# Altium PCB QCopterNano_Pcb.PcbDoc
Units mil, origin at the board's own origin, x right, y up, seen from the top; angles counter-clockwise.
Board outline 3149.61 x 3149.61 mil, 2 copper layers (Top Layer, Bottom Layer); 30 components, 37 nets, 137 pads, 54 vias.
Unrouted connection lines stored in the file: 4.
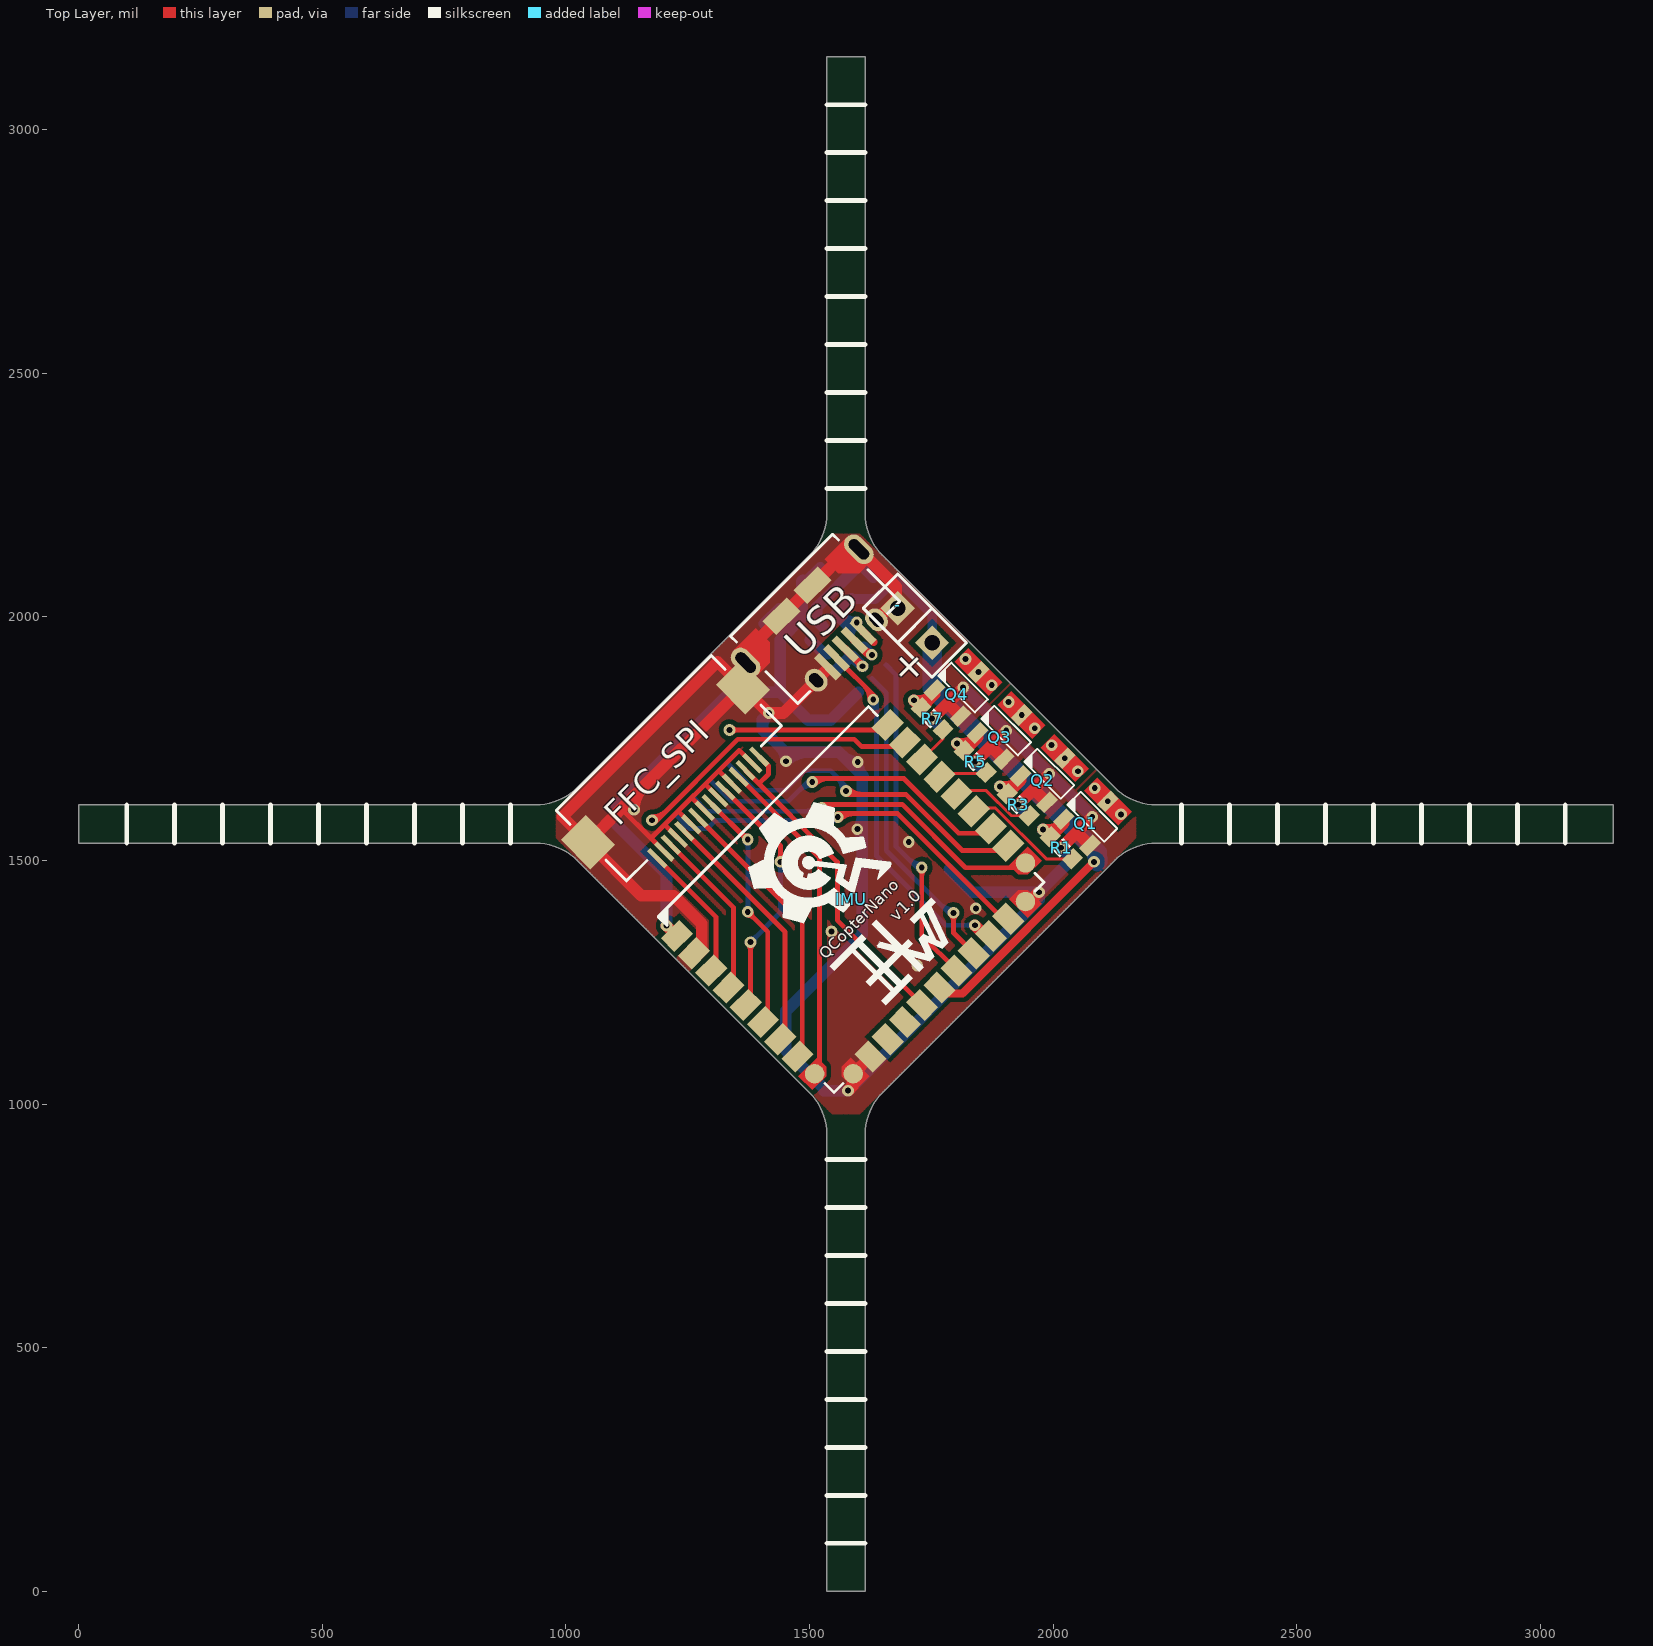
[diagram p0: Top Layer view]
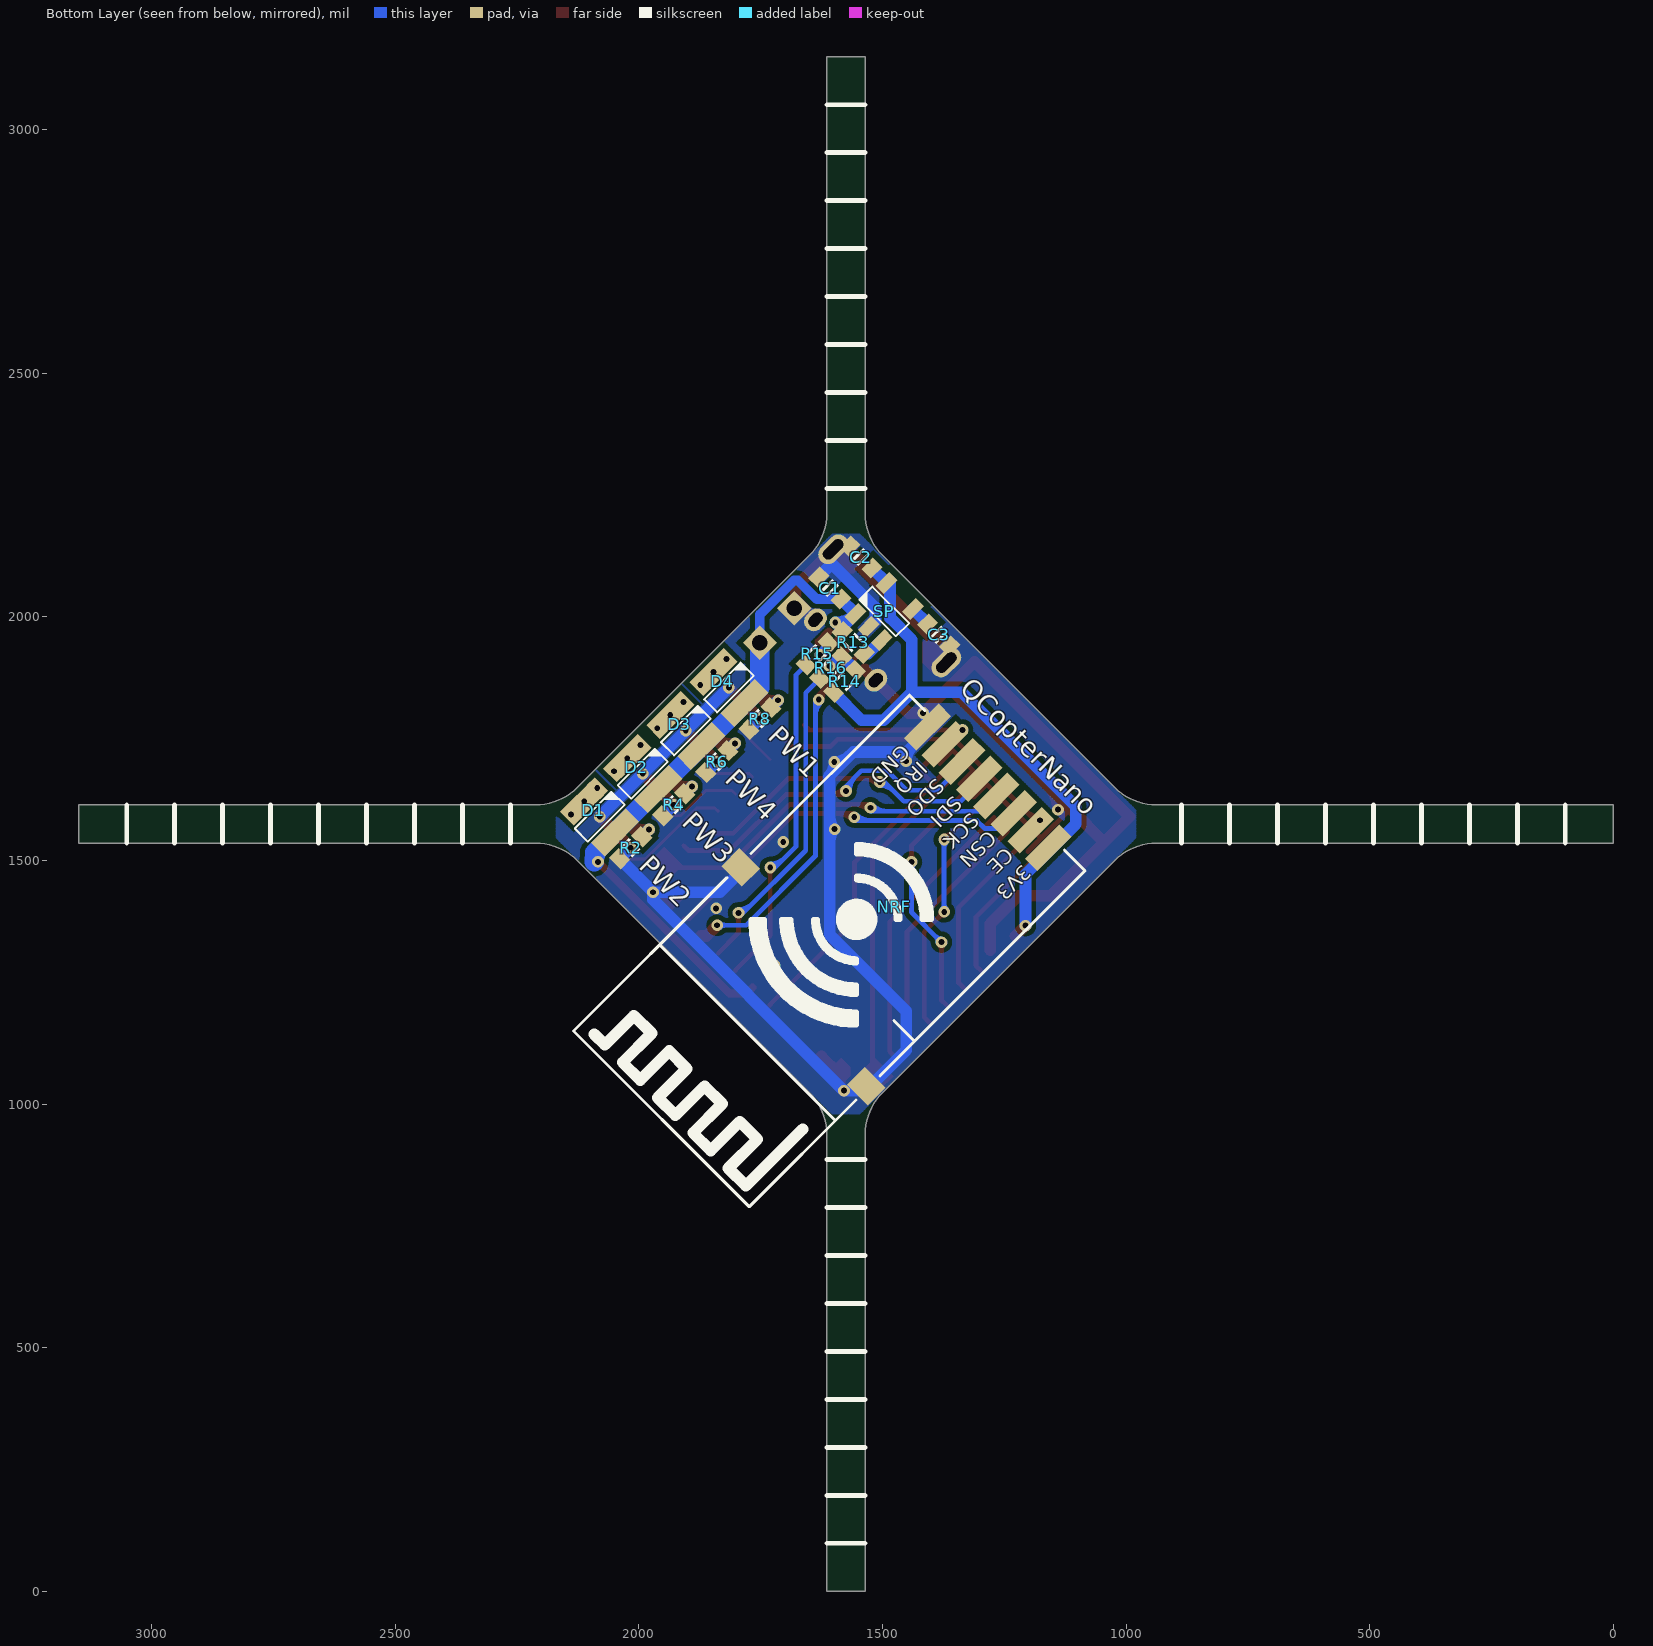
[diagram p1: Bottom Layer view, seen from below]
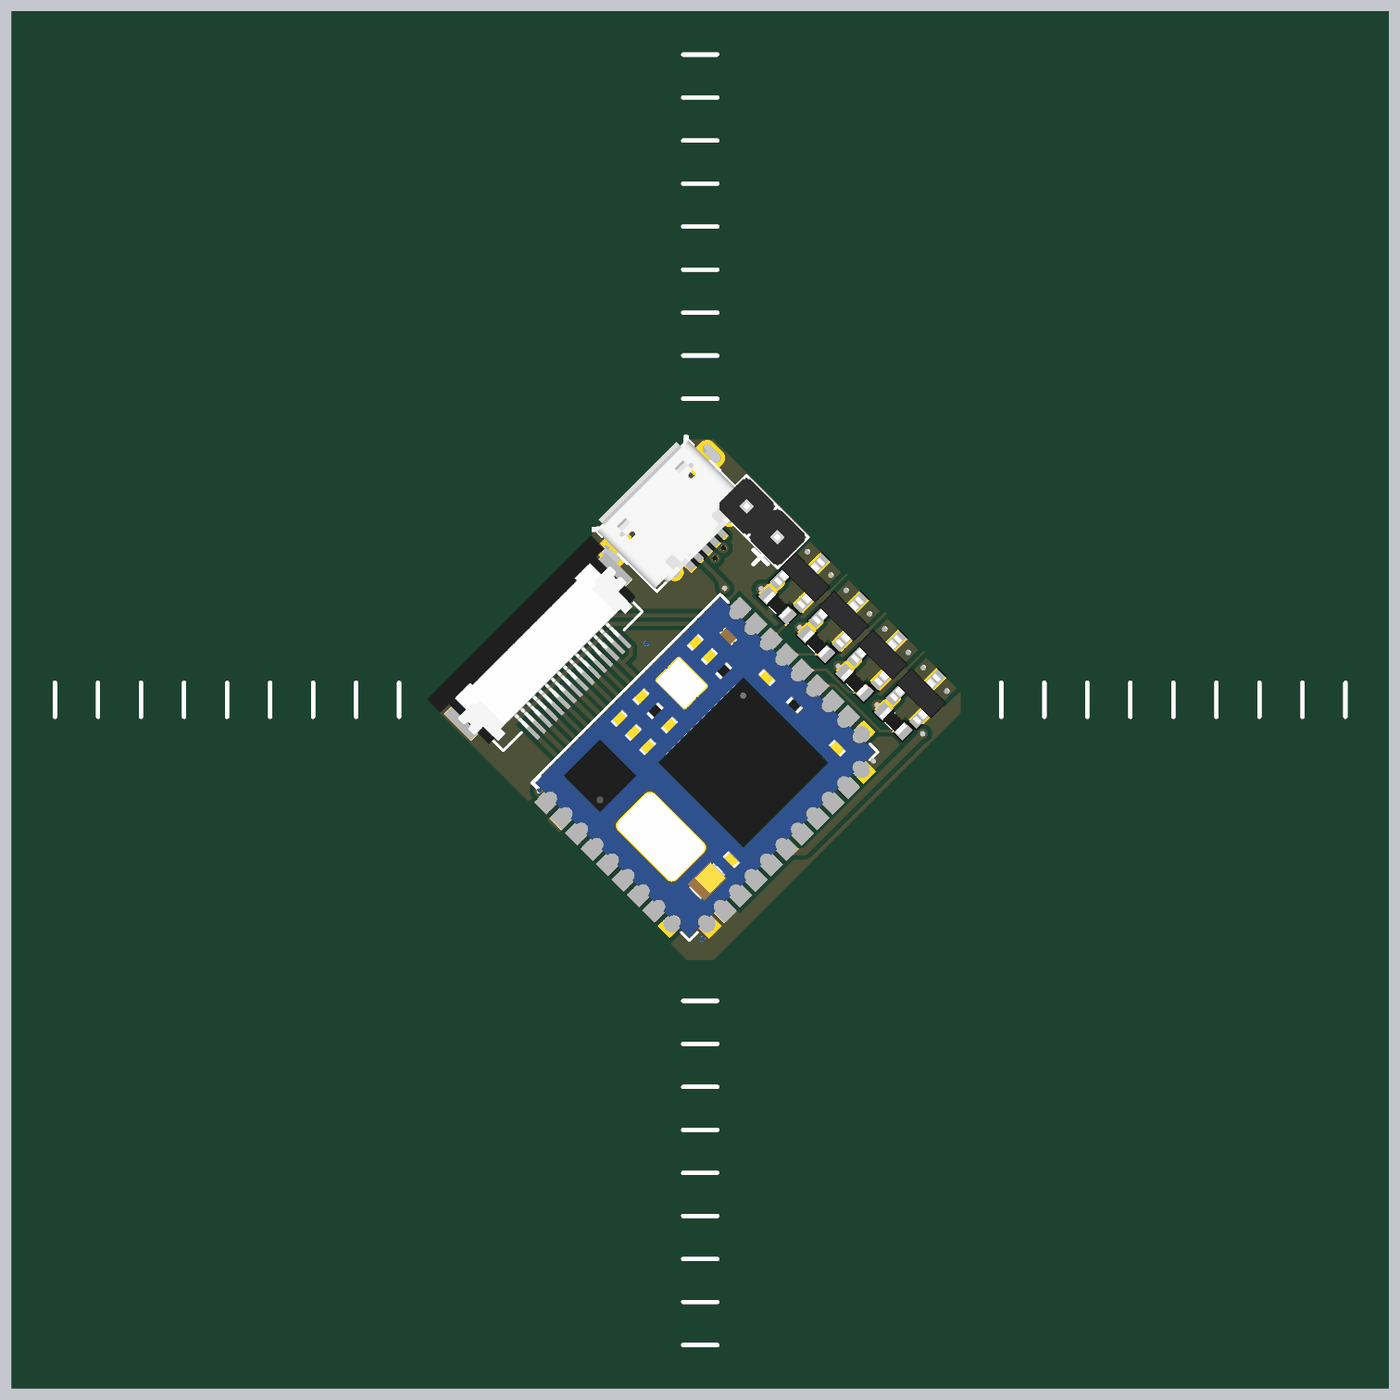
[diagram p2: 3D render of the assembled board from above, using the file's embedded part models]
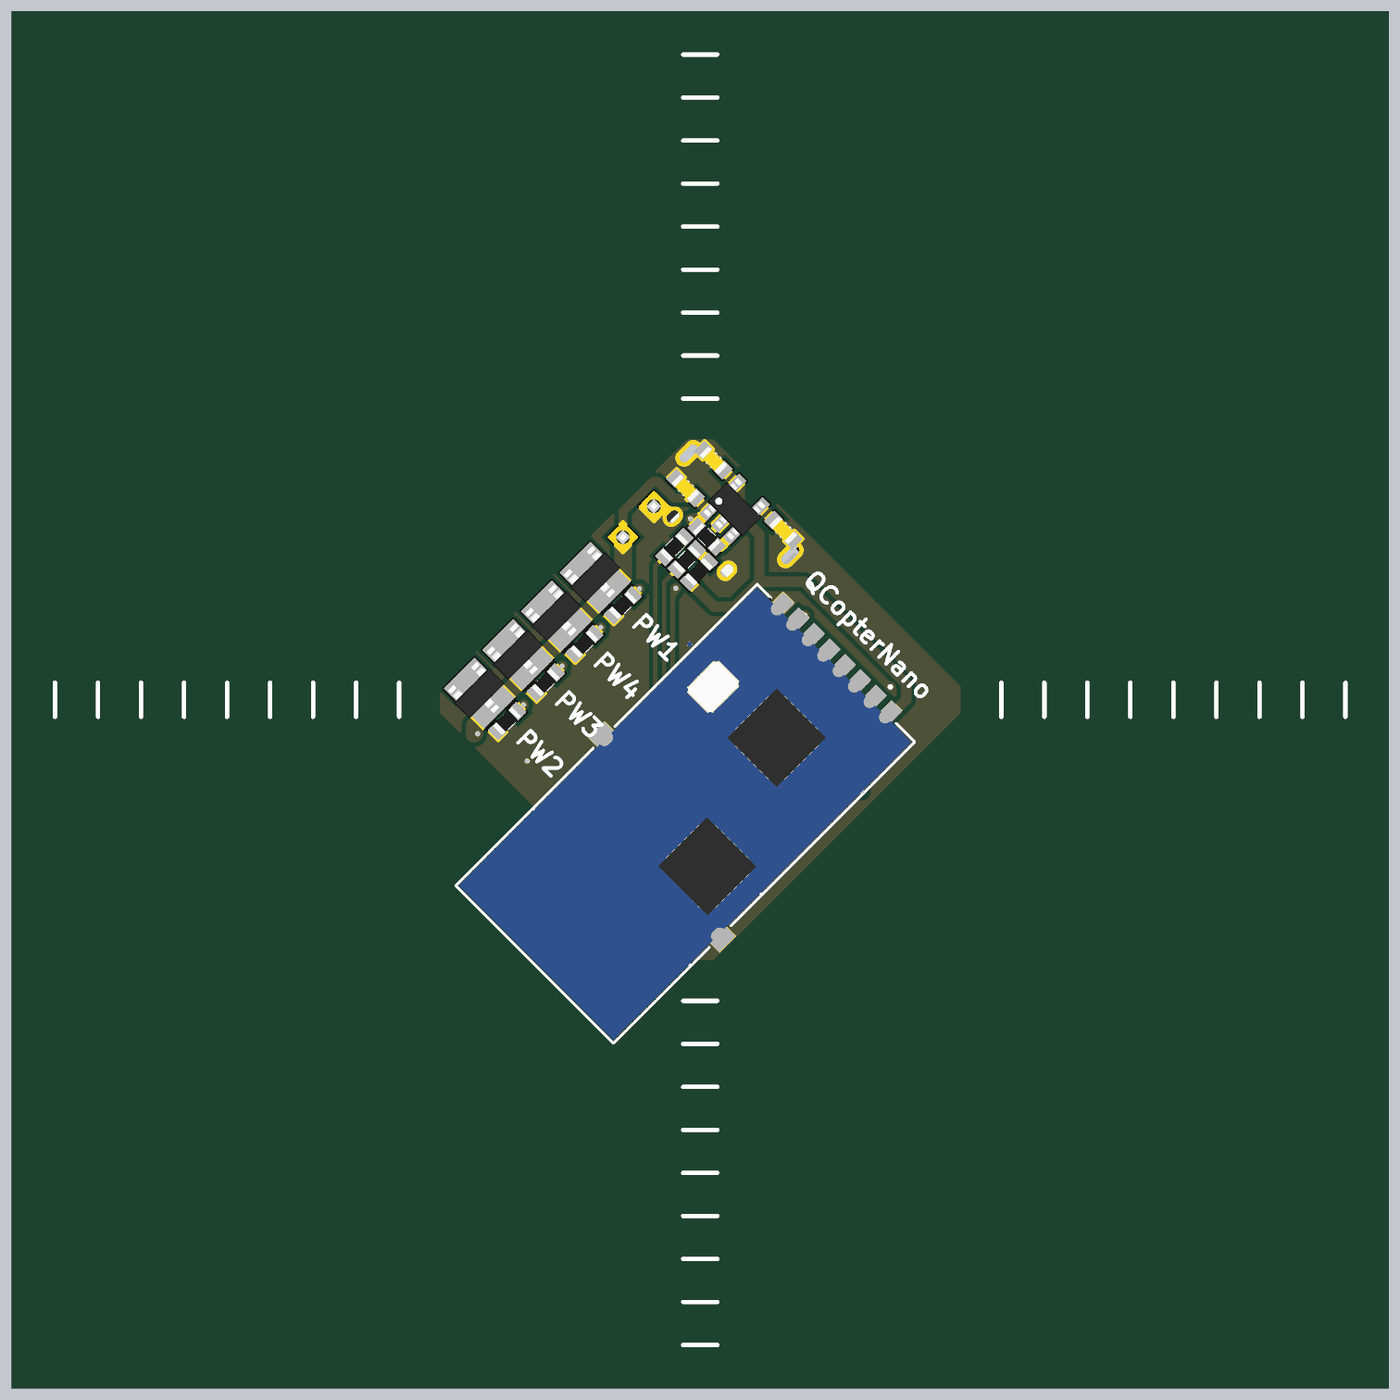
[diagram p3: 3D render of the assembled board from below, using the file's embedded part models]

## Layer stack, top to bottom
Top Solder: solder mask 0.4, Solder Resist, Dk 3.5
Top Layer: signal copper 1.4
Dielectric1: dielectric 12.6, FR-4, Dk 4.8
Bottom Layer: signal copper 1.4
Bottom Solder: solder mask 0.4, Solder Resist, Dk 3.5

## Board outline
938,1535.63 cw(c938,1414.92) 1023.35,1500.27 1500.27,1023.35 cw(c1414.92,938) 1535.63,938 1535.63,0.2 1614.37,0.2 1614.37,938 cw(c1735.08,938) 1649.73,1023.35 2126.65,1500.27 cw(c2212,1414.92) 2212,1535.63 3149.8,1535.63 3149.8,1614.37 2212,1614.37 cw(c2212,1735.08) 2126.65,1649.73 1649.73,2126.65 cw(c1735.08,2212) 1614.37,2212 1614.37,3149.8 1535.63,3149.8 1535.63,2212 cw(c1414.92,2212) 1500.27,2126.65 1023.35,1649.73 cw(c938,1735.08) 938,1614.37 0.2,1614.37 0.2,1535.63

## Design rules (kind name [scope] priority, off if disabled: settings)
Clearance ClearancePolygon [InPolygon] p1: gap=10
Clearance [All] p2: gap=6
ComponentClearance [All] p1: gap=0 collisioncheckmode=3 verticalgap=0 showdistances=FALSE
HoleToHoleClearance [All] p1: gap=6 allowstackedmicrovias=TRUE
MinimumSolderMaskSliver [All] p1: minsoldermaskwidth=1
PlaneConnect [All] p1: planeconnectstyle=Direct reliefexpansion=20 reliefentries=4 reliefconductorwidth=10 reliefairgap=10
PolygonConnect [All] p1: connectstyle=Direct reliefconductorwidth=10 reliefentries=4 polygonreliefangle="90 Angle" airgapwidth=10
RoutingVias [All] p1: holewidth=12 width=20 viastyle="Through Hole" minholewidth=12 minwidth=20 maxholewidth=28 maxwidth=50
SilkToSilkClearance [All] p1: silktosilkclearance=0
SilkToSolderMaskClearance [IsPad] p1: minsilkscreentomaskgap=1.5 clearancetoexposedcopper=TRUE
SolderMaskExpansion [All] p1: expansion=4
UnConnectedPin [All] p1 off:
Width [All] p1: maxlimit=50 minlimit=6 preferedwidth=10
23 further rules are at their usual default settings.

## Components (designator, comment, footprint, x,y, rotation, side; value= is the part's Value field where it differs from the comment)
+ "HDR1X1_180_2.54" HDR1X1_180_2.54 1751.78,1946.94 r45 top locked (schematic designator VIN)
- "HDR1X1_180_2.54" HDR1X1_180_2.54 1681.07,2017.65 r45 top locked (schematic designator GND)
C1 "Cap_0603" CAP_0603 1608.23,2059.37 r225 bottom locked
C2 "Cap_0603" CAP_0603 1544.59,2123.01 r225 bottom locked
C3 "Cap_0603" CAP_0603 1384.79,1963.2 r45 bottom locked
D1 "Diode_Schottky2" SOT23-3 2080.58,1589.85 r225 bottom locked
D2 "Diode_Schottky2" SOT23-3 1992.19,1678.24 r225 bottom locked
D3 "Diode_Schottky2" SOT23-3 1903.8,1766.63 r225 bottom locked
D4 "Diode_Schottky2" SOT23-3 1815.42,1855.01 r225 bottom locked
FFC_SPI "FFC_0.5_16" FFC_0.5_16 1246.9,1654.2 r225 top locked
IMU "SmartIMU_Full" SMART_IMU_FULL 1550.25,974.67 r45 top locked
NRF "nRF24L01P_PA_LNA" NRF24L01P_PA_LNA 1444.89,1839.46 r315 bottom locked
Q1 "MOS_N" SOT23-3 2080.58,1589.85 r45 top locked
Q2 "MOS_N" SOT23-3 1992.19,1678.24 r45 top locked
Q3 "MOS_N" SOT23-3 1903.8,1766.63 r45 top locked
Q4 "MOS_N" SOT23-3 1815.42,1855.01 r45 top locked
R1 "Res_0603" RES_0603 2016.94,1526.21 r135 top locked
R2 "Res_0603" RES_0603 2016.94,1526.21 r135 bottom locked
R3 "Res_0603" RES_0603 1928.55,1614.6 r135 top locked
R4 "Res_0603" RES_0603 1928.55,1614.6 r135 bottom locked
R5 "Res_0603" RES_0603 1840.16,1702.99 r135 top locked
R6 "Res_0603" RES_0603 1840.16,1702.99 r135 bottom locked
R7 "Res_0603" RES_0603 1751.78,1791.37 r135 top locked
R8 "Res_0603" RES_0603 1751.78,1791.37 r135 bottom locked
R13 "Res_0603" RES_0603 1560.15,1947.65 r225 bottom locked
R14 "Res_0603" RES_0603 1577.83,1867.74 r315 bottom locked
R15 "Res_0603" RES_0603 1634.4,1924.31 r315 bottom locked
R16 "Res_0603" RES_0603 1606.11,1896.03 r315 bottom locked
SP "SP6205" SOT23-5 1496.51,2011.28 r135 bottom locked
USB "USB_Micro" USB_Micro-AB 1485.2,2022.6 r45 top locked

## Footprints (in the part's own frame and the unit in brackets; to place one, negate y for a bottom-side part, rotate by r counter-clockwise, add the part's x,y. Pads: shape width x height; smd on the part's side, far side on the other; paste and mask are expansions set on the pad)
CAP_0603 [mil]
  rect 28x34 smd: 1(-32,0) 2(32,0)
  Top Layer pour cut-out: -18,17 18,17 18,-17 -18,-17
  silkscreen extent -10,-17 10,17, body extent -31,-16 31,16, height 36
FFC_0.5_16 [mil] "Connector; FH12 Series; 16 Position; 0.5mm Spaced Bottom Contact"
  rect 72x86 smd mask+1: 0(-225,-60) 0(225,-60)
  rect 10x50 smd mask+1: 1(-147.64,64) 2(-127.95,64) 3(-108.27,64) 4(-88.58,64) 5(-68.9,64) 6(-49.21,64) 7(-29.53,64) 8(-9.84,64) 9(9.84,64) 10(29.53,64) 11(49.21,64) 12(68.9,64) 13(88.58,64) 14(108.27,64) 15(127.95,64) 16(147.64,64)
  silkscreen extent -225,-152 225,52, body extent -266,-155 266,55, height 82
HDR1X1_180_2.54 [mm] "Connector; Header; 2 Position"
  rect 1.27x1.27 hole 0.8: 1(0,0)
  silkscreen extent -1.27,-1.27 1.27,1.27, body extent -1.27,-1.27 1.27,1.27, height 7.58
NRF24L01P_PA_LNA [mil]
  rect 100x36 smd mask+1: 1(20,422.6) 2(20,372.6) 3(20,322.6) 4(20,272.6) 5(20,222.6) 6(20,172.6) 7(20,122.6) 8(20,72.6)
  rect 52x60 smd mask+1: 8(495,5) 8(630,505)
  silkscreen extent 0,0 975,510, body extent 5,5 970,505, height 46
RES_0603 [mil]
  rect 28x34 smd: 1(-32,0) 2(32,0)
  Top Layer pour cut-out: -18,17 18,17 18,-17 -18,-17
  silkscreen extent -12,-17 12,17, body extent -31,-16 32,16, height 20
SMART_IMU_FULL [mil]
  rect 54x40 smd mask+1: 1(34,490) 2(34,440) 3(34,390) 4(34,340) 5(34,290) 6(34,240) 7(34,190) 8(34,140) 18(646,140) 19(646,190) 20(646,240) 21(646,290) 22(646,340) 23(646,390) 24(646,440) 25(646,490)
  rect 40x54 smd mask+1: 1(290,34) 2(140,34) 10(190,34) 11(240,34) 12(340,34) 13(390,34) 14(440,34) 15(490,34) 16(540,34)
  round 40 smd mask+0: 2(90,34) 2(590,34) 9(34,90) 17(646,90)
  Top Layer region: 673,110 619,110 619,84 633,70 673,70
  Top Layer region: 7,70 47,70 61,84 61,110 7,110
  Top Layer region: 110,7 110,61 84,61 70,47 70,7
  Top Layer region: 610,7 610,47 596,61 570,61 570,7
  silkscreen extent 35,35 645,545, body extent 40,40 640,540, height 84
SOT23-3 [mil] "SOT23, 3 pin"
  rect 40x24 smd: 1(-45,38) 2(-45,-38) 3(45,0)
  silkscreen extent -19,-53 19,53, body extent -55,-57 55,57, height 51
SOT23-5 [mil]
  rect 40x24 smd: 1(-45,38) 2(-45,0) 3(-45,-38) 4(45,-38) 5(45,38)
  silkscreen extent -19,-53 19,53, body extent -55,-57 55,57, height 57
USB_Micro-AB [mil]
  rect 15.75x64 smd: 1(51.18,-125) 2(25.59,-125) 3(0,-125) 4(-25.59,-125) 5(-51.18,-125)
  oval 40x70 hole 22 slot 50 at 90 deg mask+0: 5(-164.37,0) 5(164.37,0)
  oval 40x50 hole 22 slot 32 at 90 deg mask+0: 5(-87.6,-128) 5(87.6,-128)
  rect 70x40 smd mask+0: 5(-45,15) 5(45,15)
  Top Layer region: -164.37,35 -100,35 -100,-5 -130,-35 -164.37,-35
  Top Layer region: 100,35 164.37,35 164.37,-35 130,-35 100,-5
  silkscreen extent -148,-135 148,60, body extent -157,-138 157,75, height 107

## Part data
+ -: "Header"
C1 C2 C3: "Capacitor"
D1 D2 D3 D4: "Diode"
FFC_SPI: "FFC"
IMU NRF: "Module"
Q1 Q2 Q3 Q4: library part MOSFET_N, "MOSFET"
R1 R2 R3 R4 R5 R6 R7 R8 R13 R14 R15 R16: "Resistor"
SP: "Power"
USB: "USB"

## Free pads (board coordinates)
  rect 40x100 smd far side rot 45: 0(1783.6,1823.19) 0(1847.24,1886.83) 0(1871.98,1734.81) 0(1935.62,1798.45) 0(1960.37,1646.42) 0(2024.01,1710.06) 0(2048.76,1558.03) 0(2112.4,1621.67)

## Via types
v1: diameter 24, hole 12, Top Layer to Bottom Layer, 54 vias

## Nets (pads, with @x,y where several pads share a name; then routed paths per layer and width w, separated by ;. In a path a pad name is that pad's centre, name@x,y a point inside that pad or via, vN(x,y) a via of type N, cw(c..) or ccw(c..) an arc to the next point about the centre after c; other vN are vias at no path point)
3V3: C2.2 FFC_SPI.1 FFC_SPI.3 IMU.1 NRF.1 R14.2 SP.5 | length 1975.7
  Top Layer w10: FFC_SPI.3 1557.32,1496.89 1557.32,1377.72 IMU.1@1731.27,1203.77 ; 1396.29,1657.92 1415.9,1677.53 1415.9,1693.99 FFC_SPI.1
  Top Layer w24: v1(1206.6,1366.4) IMU.1@1227.81,1345.19
  Bottom Layer w24: v1(1206.6,1366.4) 1206.6,1471.62 1155.97,1522.25 1103.36,1574.86 1103.36,1611.06 1337.41,1845.11 1439.94,1845.11 ; SP.5@1486.61,2074.92 1484.57,2072.89 1484.57,2051.67 ; C2.2 SP.5 1491.56,2058.66 1484.57,2051.67 ; R14.2 1543.18,1787.84 1497.22,1787.84 1439.94,1845.11 ; 1439.94,1845.11 1439.94,1953.3 1484.57,1997.93 1484.57,2051.67
DM: IMU.14 R16.2 | length 711.5
  Top Layer w10: v1@1790.67,1387.62 cw(c1778.72,1375.67) 1795.62,1375.67 cw(c1812.52,1375.67) v1@1800.57,1387.62 ; v1(1795.62,1392.57) 1795.62,1351.55 IMU.14
  Bottom Layer w10: R16.2 1657.73,1844.41 1657.73,1520.55 v1@1790.67,1387.62 ; 1766.77,1411.52 ccw(c1795.62,1440.37) v1@1795.62,1399.57
DP: IMU.15 USB.4 | length 841.4
  Top Layer w10: USB.4@1555.49,1915.54 v1@1635.81,1835.22 ; 1611.91,1859.11 cw(c1583.06,1830.27) v1@1623.86,1830.27
  Top Layer w24: v1(1839.46,1367.11) 1861.38,1345.19 IMU.15
  Bottom Layer w10: v1@1625.91,1825.32 cw(c1596.89,1796.3) 1637.93,1796.3 ; v1@1632.98,1832.39 cw(c1621.03,1820.44) 1637.93,1820.44 ; v1@1637.93,1830.27 1637.93,1509.24 1780.06,1367.11 v1(1839.46,1367.11) ; v1@1834.51,1362.16 ccw(c1822.56,1350.21) 1822.56,1367.11 ccw(c1822.56,1384.01) v1@1834.51,1372.06
  other v1: 1630.86,1830.27
FFC_CS: FFC_SPI.6 IMU.5 | length 622.8
  Top Layer w10: FFC_SPI.6 1440.65,1530.05 v1(1440.65,1497.22) ; IMU.5 1379.13,1213.67 v1(1379.13,1332.46) ; v1@1374.18,1327.51 cw(c1362.23,1315.56) 1379.13,1315.56 cw(c1396.03,1315.56) v1@1384.08,1327.51 ; v1@1435.7,1502.17 ccw(c1423.75,1514.12) 1440.65,1514.12 ccw(c1457.55,1514.12) v1@1445.6,1502.17
  Bottom Layer w10: v1(1379.13,1332.46) 1440.65,1393.98 v1(1440.65,1497.22) ; v1@1379.13,1339.46 ccw(c1379.13,1356.36) 1391.08,1344.41 ccw(c1403.03,1332.46) v1@1386.13,1332.46 ; v1@1435.7,1492.27 cw(c1423.75,1480.32) 1440.65,1480.32 cw(c1457.55,1480.32) v1@1445.6,1492.27
FFC_IO: FFC_SPI.4 IMU.9 | length 682
  Top Layer w10: FFC_SPI.4 1520.55,1505.82 1520.55,1072.25 IMU.9
FFC_SCK: FFC_SPI.8 IMU.6 | length 609.3
  Top Layer w10: FFC_SPI.8 1371.84,1543.18 v1(1373.47,1543.18) ; 1358.73,1556.29 ccw(c1373.47,1571.03) v1@1373.47,1550.18 ; 1362.68,1552.34 cw(c1353.52,1543.18) v1@1366.47,1543.18 ; v1@1373.47,1387.69 cw(c1373.47,1370.79) 1385.42,1382.74 cw(c1397.37,1394.69) v1@1380.47,1394.69 ; v1@1373.47,1391.86 v1(1373.47,1394.69) 1414.49,1353.68 1414.49,1178.31 IMU.6
  Bottom Layer w10: v1@1368.52,1399.64 ccw(c1356.58,1411.59) 1373.47,1411.59 ccw(c1390.37,1411.59) v1@1378.42,1399.64 ; v1@1368.52,1538.23 cw(c1356.58,1526.28) 1373.47,1526.28 cw(c1390.37,1526.28) v1@1378.42,1538.23 ; v1(1373.47,1394.69) v1(1373.47,1543.18)
FFC_SDI: FFC_SPI.10 IMU.8 | length 583.1
  Top Layer w10: FFC_SPI.10 1485.2,1374.14 1485.2,1107.6 IMU.8
FFC_SDO: FFC_SPI.12 IMU.7 | length 516.8
  Top Layer w10: FFC_SPI.12 1449.84,1353.82 1449.84,1142.96 IMU.7
GND: -.1 C1.1 C2.1 C3.1 FFC_SPI.0 FFC_SPI.2 FFC_SPI.5 FFC_SPI.7 FFC_SPI.9 FFC_SPI.11 FFC_SPI.13 FFC_SPI.15 IMU.2 NRF.8 Q1.2 Q2.2 Q3.2 Q4.2 R2.1 R4.1 R6.1 R8.1 SP.2 USB.5 | length 6434.4
  Top Layer w10: 1114,1606.15 1174.78,1545.37 ; FFC_SPI.15 1174.78,1545.37 ; 1202.62,1573.21 FFC_SPI.13 ; 1230.46,1601.05 FFC_SPI.11 ; 1258.29,1628.89 FFC_SPI.9 ; 1286.13,1656.72 FFC_SPI.7 ; 1313.97,1684.56 FFC_SPI.5 ; FFC_SPI.2 1355.73,1726.32 1174.78,1545.37
  Top Layer w24: v1(1139.99,1604.56) cw(c1206.56,1604.56) 1159.49,1651.63 ; IMU.2@1279.04,1315.81 1279.04,1370.32 1221.45,1427.92 1154.98,1427.92 FFC_SPI.0@1045.38,1537.52 ; USB.5@1368.97,1906.37 1368.97,1927.58 1442.77,2001.39 1506.41,2065.02 1580.21,2138.83 1601.42,2138.83 1678.24,2062.01 1678.24,2034.62 USB.5@1637.65,1994.03 ; USB.5@1536.11,1892.49 1513.77,1870.15 1446.31,1802.69 v1(1416.61,1802.69) FFC_SPI.0@1363.57,1855.72 ; IMU.2@1589.85,1053.31 cw(c1553.64,1053.31) v1(1579.24,1027.7) 1589.85,1038.31 1589.85,1062.35 IMU.2@1625.2,1097.7 ; v1(1751.78,1791.37) 1783.6,1823.19 ; Q4.2 1783.6,1823.19 ; v1(1815.42,1855.01) 1783.6,1823.19 ; v1(1840.16,1702.99) 1871.98,1734.81 ; Q3.2 1871.98,1734.81 ; v1(1903.8,1766.63) 1871.98,1734.81 ; v1(1928.55,1614.6) 1960.37,1646.42 ; IMU.2@1951.89,1415.9 v1(1970.98,1434.99) ; Q2.2 1960.37,1646.42 ; v1(1992.19,1678.24) 1960.37,1646.42 ; v1(2016.94,1526.21) 2048.76,1558.03 ; Q1.2 2048.76,1558.03 ; v1(2080.58,1589.85) 2048.76,1558.03 ; FFC_SPI.0@1045.38,1537.52 993.05,1589.85 1311.25,1908.05 FFC_SPI.0@1363.57,1855.72 ; FFC_SPI.0@1045.38,1537.52 1114,1606.15 FFC_SPI.0@1363.57,1855.72
  Bottom Layer w24: NRF.8@1403.46,1770.94 cw(c1448.36,1770.94) v1(1416.61,1802.69) 1403.46,1789.54 1403.46,1769.74 1450.41,1722.79 ; 1439.56,1733.63 cw(c1409.62,1703.69) v1(1451.96,1703.69) ; 1498.06,1722.79 ccw(c1498.06,1657.6) v1(1451.96,1703.69) ; SP.2 1514.57,1993.22 1514.57,2019.45 1603.99,2108.87 C1.1 ; NRF.8@1529.04,1027.7 v1(1579.24,1027.7) 1970.98,1419.44 v1(1970.98,1434.99) ; NRF.8@1529.04,1032.65 1451.26,1110.43 1451.26,1191.04 1608.23,1348.02 1608.23,1674.7 1560.15,1722.79 1450.41,1722.79 ; 1567.66,1715.28 ccw(c1599.04,1746.66) v1(1599.04,1702.28) ccw(c1637.98,1700.11) 1610.4,1672.53 ; 1608.23,1540.49 ccw(c1574.43,1540.49) v1(1598.33,1564.39) ccw(c1574.43,1588.29) 1608.23,1588.29 ; v1(1751.78,1791.37) R8.1 ; NRF.8@1787.13,1481.66 1833.8,1434.99 v1(1970.98,1434.99) ; v1(1815.42,1855.01) v1(1903.8,1766.63) v1(1992.19,1678.24) v1(2080.58,1589.85) ; v1(1840.16,1702.99) R6.1 ; v1(1928.55,1614.6) R4.1 ; 1959.98,1408.44 ccw(c1933.42,1434.99) v1(1970.98,1434.99) ; v1(2016.94,1526.21) R2.1 v1(1970.98,1434.99) ; 1450.41,1722.78 cw(c1439.95,1712.33) v1(1451.96,1703.69)
  other v1: 1721.37,1284.38 1545.3,1354.38 1841.58,1401.76 1703.69,1538.23
ID: IMU.13 R15.2 | length 748.5
  Top Layer w10: v1@1725.61,1480.95 cw(c1713.66,1469) 1730.56,1469 cw(c1747.46,1469) v1@1735.51,1480.95 ; v1(1730.56,1485.9) 1730.56,1345.9 IMU.13
  Bottom Layer w10: R15.2 1677.53,1881.18 1677.53,1529.04 v1@1725.44,1481.13 ; 1701.71,1504.85 ccw(c1730.56,1533.7) v1@1730.56,1492.9
M1: D1.1 D1.2 pad.0@2112.4,1621.67 Q1.3
  other v1: 2139.27,1594.8 2112.4,1621.67 2085.53,1648.54
M2: D2.1 D2.2 pad.0@2024.01,1710.06 Q2.3
  other v1: 2050.88,1683.19 2024.01,1710.06 1997.14,1736.93
M3: D3.1 D3.2 pad.0@1935.62,1798.45 Q3.3
  other v1: 1962.49,1771.58 1935.62,1798.45 1908.75,1825.32
M4: D4.1 D4.2 pad.0@1847.24,1886.83 Q4.3
  other v1: 1874.11,1859.96 1847.24,1886.83 1820.37,1913.7
NetC3_2: C3.2 SP.4 | length 43
  Bottom Layer w24: C3.2 SP.4
NetQ1_1: Q1.1 R1.2 R2.2 | length 135.6
  Top Layer w24: Q1.1 Q1.1@2021.89,1576.41 ; Q1.1@2021.89,1576.41 cw(c1988.86,1609.44) v1(1979.47,1563.69) R1.2 Q1.1@2021.89,1576.41
  Bottom Layer w24: v1(1979.47,1563.69) R2.2
NetQ2_1: Q2.1 R3.2 R4.2 | length 135.6
  Top Layer w24: Q2.1 Q2.1@1933.5,1664.8 ; Q2.1@1933.5,1664.8 cw(c1900.47,1697.83) v1(1891.08,1652.07) R3.2 Q2.1@1933.5,1664.8
  Bottom Layer w24: v1(1891.08,1652.07) R4.2
NetQ3_1: Q3.1 R5.2 R6.2 | length 135.6
  Top Layer w24: Q3.1 Q3.1@1845.11,1753.19 ; Q3.1@1845.11,1753.19 cw(c1812.08,1786.22) v1(1802.69,1740.46) R5.2 Q3.1@1845.11,1753.19
  Bottom Layer w24: v1(1802.69,1740.46) R6.2
NetQ4_1: Q4.1 R7.2 R8.2 | length 135.6
  Top Layer w24: Q4.1 Q4.1@1756.73,1841.58 ; Q4.1@1756.73,1841.58 cw(c1723.7,1874.61) v1(1714.3,1828.85) R7.2 Q4.1@1756.73,1841.58
  Bottom Layer w24: v1(1714.3,1828.85) R8.2
NetR13_2: R13.2 SP.3 | length 47.5
  Bottom Layer w24: SP.3 1529.04,1925.02 R13.2
NetR14_1: R14.1 R16.1 USB.3 | length 119.7
  Top Layer w16: USB.3 v1@1606.11,1901.68
  Bottom Layer w24: R14.1 R16.1 1589.14,1918.65 v1(1608.94,1898.85)
NetR15_1: R15.1 USB.2 | length 89.8
  Top Layer w16: USB.2 1619.13,1924.85 1619.71,1924.85 1622.38,1922.19 v1@1626.62,1922.19 ; USB.2@1610.56,1933.43 ccw(c1628.03,1950.9) v1@1628.03,1926.19
  Bottom Layer w22: R15.1@1611.77,1938.45 v1(1628.03,1922.19)
NRF_CE: IMU.24 NRF.2 | length 627
  Top Layer w10: v1@1176.9,1589.78 ccw(c1176.9,1630.58) 1205.75,1601.73 ; v1@1181.85,1577.83 1352.97,1748.95 1591.97,1748.95 1607.21,1733.71 1687.04,1733.71 IMU.24
  other v1: 1176.9,1582.78
NRF_CSN: IMU.16 NRF.3 | length 879.7
  Top Layer w10: v1@1555.91,1591.26 cw(c1567.86,1579.31) 1567.86,1596.21 ; v1@1558.03,1596.21 1681.07,1596.21 1896.73,1380.55 IMU.16 ; v1@1562.98,1584.19 cw(c1592,1555.17) 1592,1596.21
  Bottom Layer w10: NRF.3@1226.68,1592.96 1253.83,1565.81 1290.04,1565.81 1306.3,1582.07 v1@1558.03,1582.07 ; 1524.06,1582.07 ccw(c1524.06,1623.11) v1@1553.08,1594.09 ; 1548.2,1582.07 ccw(c1548.2,1598.97) v1@1560.15,1587.02
  other v1: 1558.03,1589.14
NRF_IRQ: IMU.25 NRF.7 | length 355.2
  Top Layer w10: v1(1336,1768.04) 1650.66,1768.04 IMU.25 ; v1@1340.95,1763.09 cw(c1352.9,1751.14) 1352.9,1768.04 cw(c1352.9,1784.94) v1@1340.95,1772.99
NRF_SCK: IMU.17 NRF.4 | length 841.2
  Top Layer w10: v1@1522.67,1610.36 cw(c1534.62,1598.41) 1534.62,1615.31 ; v1@1524.8,1615.31 1690.26,1615.31 1820.37,1485.2 IMU.17@1932.09,1485.2 ; v1@1529.75,1603.28 cw(c1558.77,1574.26) 1558.77,1615.31 ; IMU.17@1932.8,1484.49 IMU.17
  Bottom Layer w10: NRF.4@1262.04,1628.32 1289.19,1601.16 v1@1524.8,1601.16 ; 1490.82,1601.16 ccw(c1490.82,1642.2) v1@1519.85,1613.18 ; 1514.97,1601.16 ccw(c1514.97,1618.06) v1@1526.92,1606.11
  other v1: 1524.8,1608.23
NRF_SDI: IMU.19 NRF.5 | length 734.4
  Top Layer w10: v1@1503.58,1663.39 cw(c1515.53,1651.44) 1515.53,1668.34 ; v1@1505.7,1668.34 1693.79,1668.34 1806.22,1555.91 1862.79,1555.91 IMU.19 ; v1@1510.65,1656.32 cw(c1539.67,1627.3) 1539.67,1668.34
  Bottom Layer w10: NRF.5@1297.39,1663.67 1339.39,1621.67 1456.21,1621.67 v1@1500.75,1666.22 ; 1476.85,1642.32 cw(c1505.7,1613.47) v1@1505.7,1654.27
  other v1: 1505.7,1661.27
NRF_SDO: IMU.18 NRF.6 | length 763.8
  Top Layer w10: v1@1572.88,1640.76 ccw(c1584.83,1652.71) 1584.83,1635.81 ; v1@1575,1635.81 1698.04,1635.81 1813.29,1520.55 1898.15,1520.55 IMU.18 ; v1@1579.95,1647.83 ccw(c1608.97,1676.85) 1608.97,1635.81
  Bottom Layer w10: NRF.6@1332.75,1699.03 1387.48,1644.3 1450.55,1644.3 1490.52,1684.27 1543.41,1684.27 v1@1579.95,1647.73 ; 1556.12,1671.56 cw(c1527.44,1642.88) v1@1568,1642.88
  other v1: 1575,1642.88
PWM1: IMU.20 R1.1 | length 248.4
  Top Layer w6: IMU.20 1844.22,1608.04 1881.37,1608.04 1985.83,1503.58 R1.1
PWM2: IMU.21 R3.1 | length 173.4
  Top Layer w6: IMU.21 1808.86,1643.4 1862.98,1643.4 1914.41,1591.97 R3.1
PWM3: IMU.22 R5.1 | length 97.4
  Top Layer w6: IMU.22 1773.5,1678.75 R5.1@1861.19,1678.75
PWM4: IMU.23 R7.1 | length 79.4
  Top Layer w6: IMU.23 1774.4,1750.36 R7.1
RX: FFC_SPI.14 IMU.4 | length 350.5
  Top Layer w10: FFC_SPI.14 1343.78,1404.21 1343.78,1249.02 IMU.4
SWC: IMU.10
SWD: IMU.11
TX: FFC_SPI.16 IMU.3 | length 284.1
  Top Layer w10: FFC_SPI.16 1308.42,1383.89 1308.42,1284.38 IMU.3
VBUS: +.1 C1.2 D1.3 D2.3 D3.3 D4.3 IMU.12 pad.0@1783.6,1823.19 pad.0@1871.98,1734.81 pad.0@1960.37,1646.42 pad.0@2048.76,1558.03 R13.1 SP.1 USB.1 | length 1596.7
  Top Layer w16: USB.1 USB.1@1631.82,1948.35 ; IMU.12 1778.5,1227.25 1814.14,1227.25 v1(2084.12,1497.22)
  Bottom Layer w20: C1.2 1635.1,2036.74 1673.29,2074.92 1681.77,2074.92 1751.78,2004.92 +.1 +.1@1744,1939.16
  Bottom Layer w24: SP.1@1555.88,2005.66 ccw(c1596.92,2046.7) v1(1596.92,1988.66) ; R13.1@1582.78,1978.76 SP.1 C1.2 ; 2084.12,1522.67 v1(2084.12,1497.22) ; v1(1596.92,1988.66) ccw(c1601.8,1970.27) R13.1 1582.78,1974.52 v1(1596.92,1988.66) ; v1(2084.12,1497.22) ccw(c2075.28,1518.43) 2098.26,1518.43 2098.26,1511.36 v1(2084.12,1497.22)
  Bottom Layer w40: +.1 1751.78,1855.01 D1.3 ; pad.0@2055.83,1550.96 2091.19,1515.6 ; pad.0@2079.77,1527.02 cw(c2049.97,1497.22) v1@2092.12,1497.22

## Polygon pours and split planes (outlines as drawn)
GND on Bottom Layer "Top Layer" (hatched 90Degree grid 2 track 4, remove dead copper, pour order 5): 981.03,1546.72 981.03,1603.28 1546.72,2168.97 1603.28,2168.97 2168.97,1603.28 2168.97,1546.72 1603.28,981.03 1546.72,981.03
GND on Top Layer "Top Layer" (hatched 90Degree grid 2 track 4, remove dead copper, pour order 3): 981.03,1546.72 981.03,1603.28 1546.72,2168.97 1603.28,2168.97 2168.97,1603.28 2168.97,1546.72 1603.28,981.03 1546.72,981.03

## Other copper
Top Layer:
  region net M1: 2133.61,1572.17 2161.9,1600.46 2091.19,1671.17 2062.9,1642.88
  region net M2: 2045.23,1660.56 2073.51,1688.84 2002.8,1759.55 1974.52,1731.27
  region net M3: 1956.84,1748.95 1985.12,1777.23 1914.41,1847.94 1886.13,1819.66
  region net M4: 1868.45,1837.34 1896.73,1865.62 1826.02,1936.33 1797.74,1908.05

## Silkscreen, mask and mechanical layers (free items; w line width, h text height)
Top Overlay:
  drawing of 3120 lines, arcs and shapes, not listed
  text "v1.0" at 1678.77,1373.3 h25 r45
  text "QCopterNano" at 1533.1,1295.52 h23 r45
Bottom Overlay:
  lines w10: 98.62,1536.1 98.62,1613.9 ; 197.05,1536.1 197.05,1613.9 ; 295.47,1536.1 295.47,1613.9 ; 393.9,1536.1 393.9,1613.9 ; 492.32,1536.1 492.32,1613.9 ; 590.75,1536.1 590.75,1613.9 ; 689.17,1536.1 689.17,1613.9 ; 787.6,1536.1 787.6,1613.9 ; 886.02,1536.1 886.02,1613.9 ; 1536.1,98.62 1613.9,98.62 ; 1536.1,197.05 1613.9,197.05 ; 1536.1,295.47 1613.9,295.47 ; 1536.1,393.9 1613.9,393.9 ; 1536.1,492.32 1613.9,492.32 ; 1536.1,590.75 1613.9,590.75 ; 1536.1,689.17 1613.9,689.17 ; 1536.1,787.6 1613.9,787.6 ; 1536.1,886.02 1613.9,886.02 ; 1536.1,2263.98 1613.9,2263.98 ; 1536.1,2362.4 1613.9,2362.4 ; 1536.1,2460.83 1613.9,2460.83 ; 1536.1,2559.25 1613.9,2559.25 ; 1536.1,2657.68 1613.9,2657.68 ; 1536.1,2756.1 1613.9,2756.1 ; 1536.1,2854.53 1613.9,2854.53 ; 1536.1,2952.95 1613.9,2952.95 ; 1536.1,3051.38 1613.9,3051.38 ; 2263.98,1536.1 2263.98,1613.9 ; 2362.4,1536.1 2362.4,1613.9 ; 2460.83,1536.1 2460.83,1613.9 ; 2559.25,1536.1 2559.25,1613.9 ; 2657.68,1536.1 2657.68,1613.9 ; 2756.1,1536.1 2756.1,1613.9 ; 2854.53,1536.1 2854.53,1613.9 ; 2952.95,1536.1 2952.95,1613.9 ; 3051.38,1536.1 3051.38,1613.9
  text "QCopterNano" at 1343.78,1850.06 h40 r45
  text "PW1" at 1737.63,1751.78 h40 r45
  text "PW4" at 1826.02,1663.39 h40 r45
  text "PW3" at 1914.41,1575 h40 r45
  text "PW2" at 2002.8,1486.61 h40 r45
Mechanical 1:
  the board outline again, w2
Mechanical 13:
  circle w2: c0.2,1575 r885.83
  circle w2: c3149.8,1575 r885.83
  circle w2: c1575,0.2 r885.83
  circle w2: c1575,3149.8 r885.83
  lines w2: -13.24,1561.57 13.63,1588.43 ; -13.24,1588.43 13.63,1561.57 ; 1561.56,-13.24 1588.43,13.63 ; 1561.56,13.63 1588.43,-13.24 ; 1561.56,3136.37 1588.43,3163.24 ; 1561.56,3163.24 1588.43,3136.37 ; 3136.37,1561.57 3163.24,1588.43 ; 3136.37,1588.43 3163.24,1561.57
Mechanical 14:
  circle w2: c0.2,1575 r137.8
  circle w2: c3149.8,1575 r137.8
  circle w2: c1575,0.2 r137.8
  circle w2: c1575,3149.8 r137.8
Drill Drawing:
  text ".Legend" at 3420,14 h60

## Dimensions
0.2,1614.37 to 1614.37,0.2 on Mechanical 1
1500.27,2126.65 to 2126.65,1500.27 on Mechanical 1
1614.37,3149.8 to 1614.37,0.2 on Mechanical 1
3149.8,1614.37 to 0.2,1614.37 on Mechanical 1

## Text inside footprints (layer, text, board x,y; h text height)
NRF: Bottom Overlay "CE" at 1249.02,1529.04 h30 r135; Bottom Overlay "3V3" at 1213.67,1493.68 h30 r135; Bottom Overlay "CSN" at 1284.38,1564.39 h30 r135; Bottom Overlay "SCK" at 1319.73,1599.75 h30 r135; Bottom Overlay "SDI" at 1355.09,1635.1 h30 r135; Bottom Overlay "SDO" at 1390.45,1670.46 h30 r135; Bottom Overlay "IRQ" at 1425.8,1705.81 h30 r135; Bottom Overlay "GND" at 1461.16,1741.17 h30 r135